# EAGLE board tinyha_blinds2_vrt (EAGLE 7.7.0)
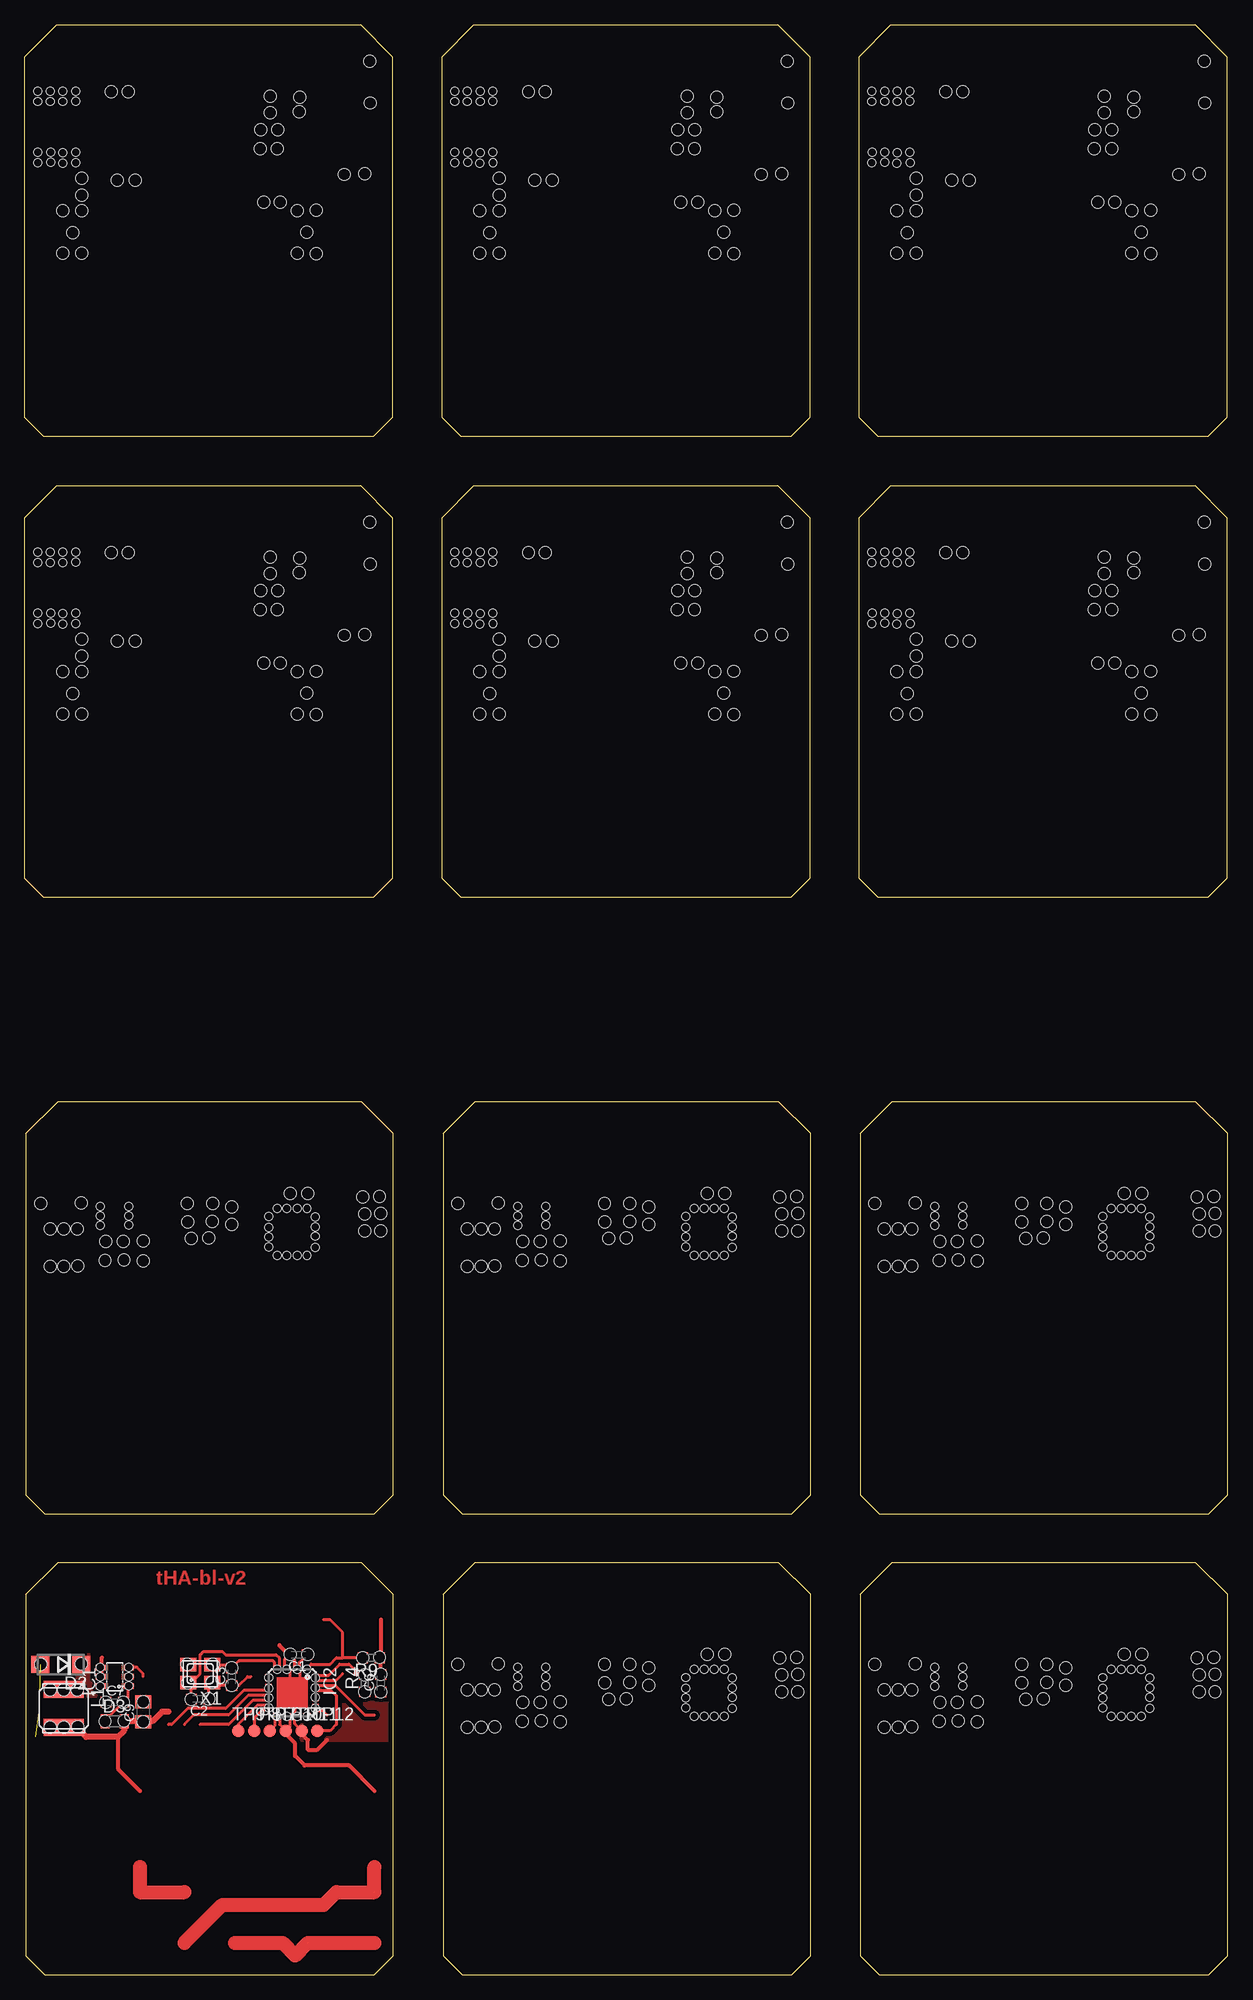
[diagram p0: board, top side]
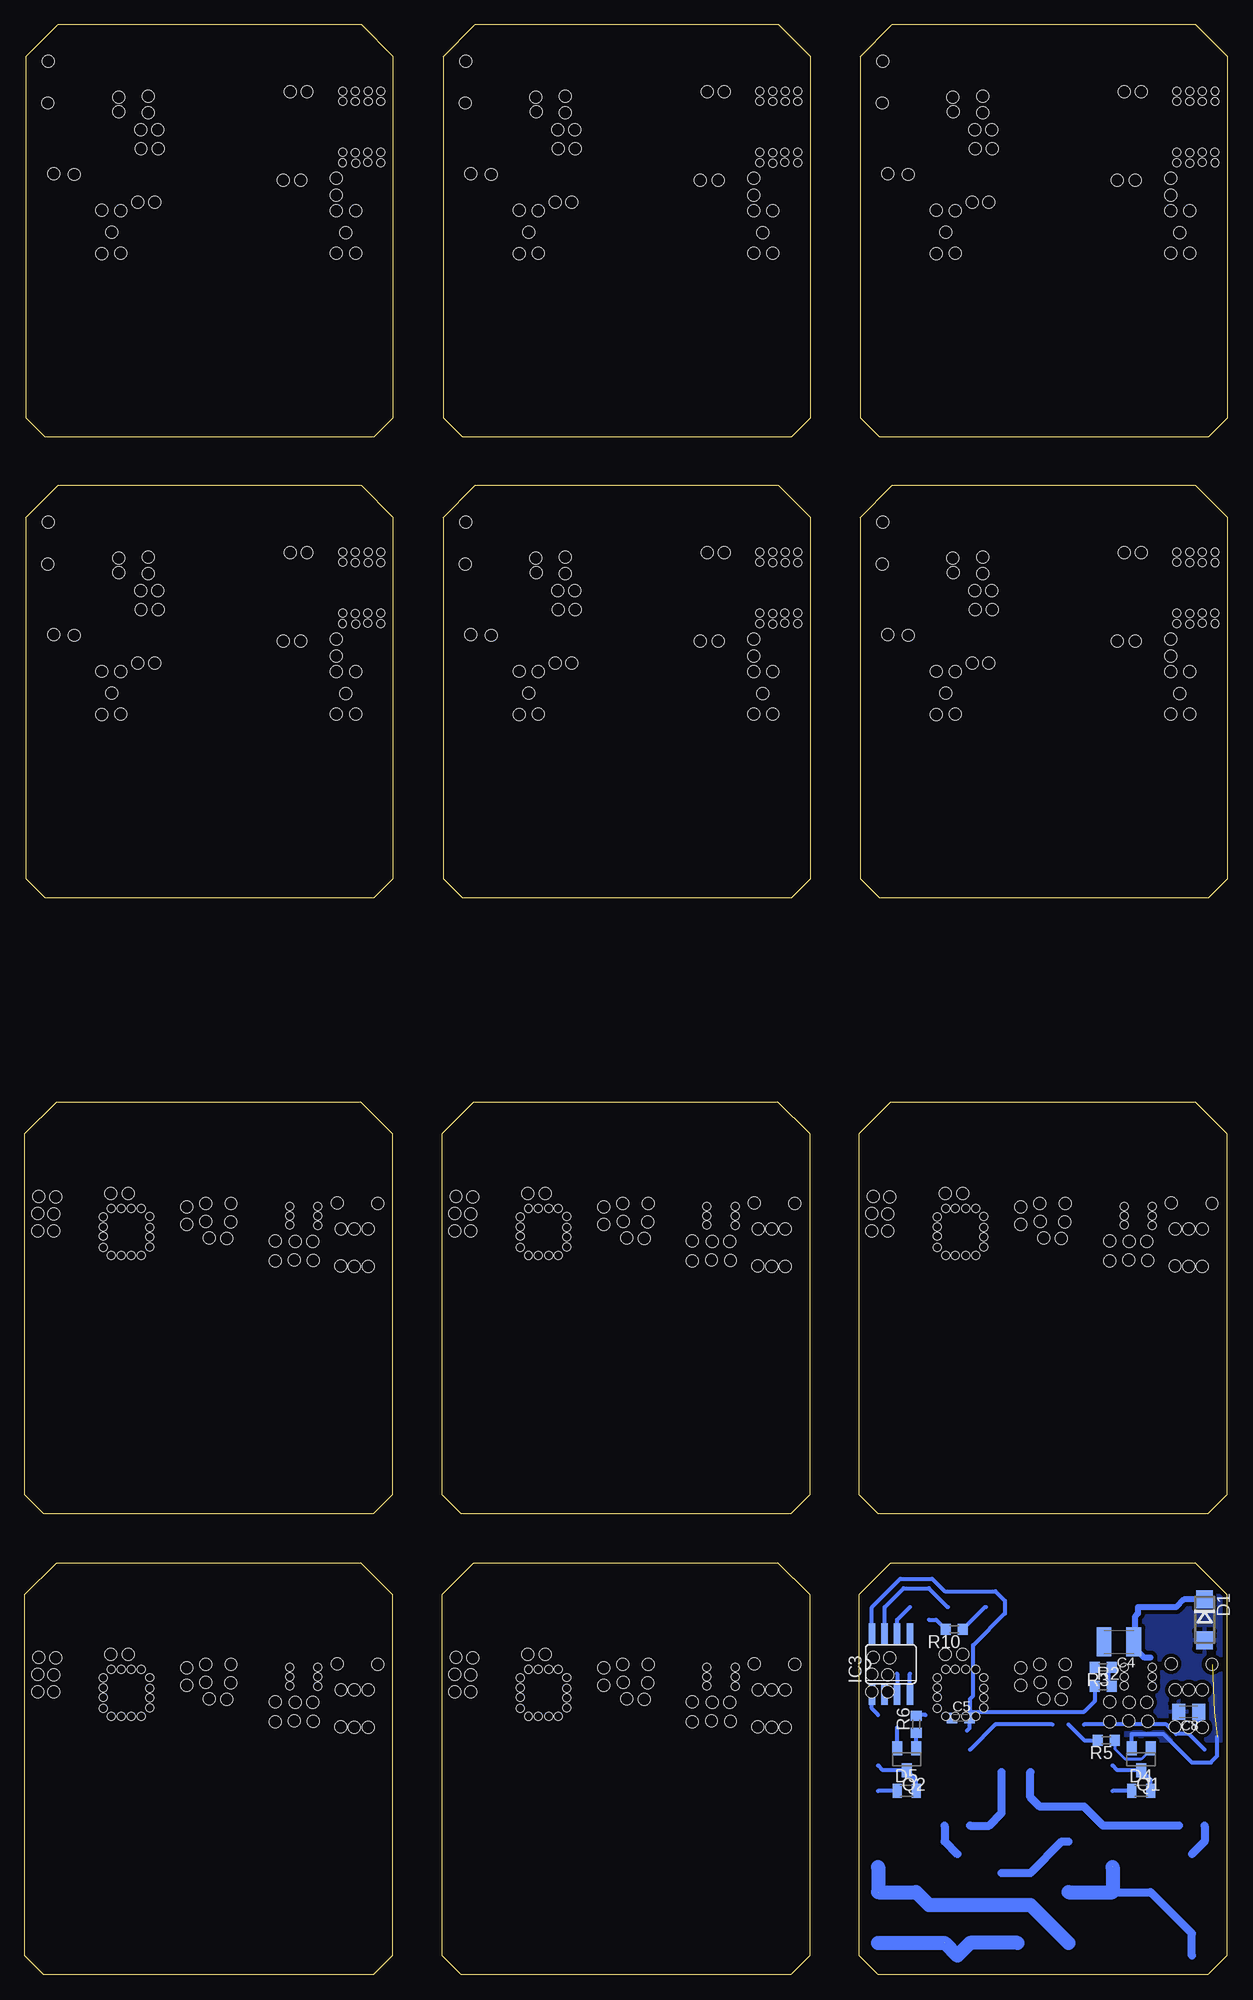
[diagram p1: board, bottom side, seen from below]

Size 120.53 x 195.43 mm. Coordinates in mm from the lower left corner, seen from the top.
Outline: 33.75,41.27 3.27,41.27 0.1,38.1 0.1,1.91 2,0 35.02,0 36.93,1.91 36.93,38.1 33.75,41.27
Outline: 75.55,41.27 45.07,41.27 41.9,38.1 41.9,1.91 43.8,0 76.82,0 78.73,1.91 78.73,38.1 75.55,41.27
Outline: 117.35,41.27 86.87,41.27 83.7,38.1 83.7,1.91 85.6,0 118.62,0 120.53,1.91 120.53,38.1 117.35,41.27
Outline: 33.75,87.47 3.27,87.47 0.1,84.3 0.1,48.1 2,46.2 35.02,46.2 36.93,48.1 36.93,84.3 33.75,87.47
Outline: 75.55,87.47 45.07,87.47 41.9,84.3 41.9,48.1 43.8,46.2 76.82,46.2 78.73,48.1 78.73,84.3 75.55,87.47
Outline: 117.35,87.47 86.87,87.47 83.7,84.3 83.7,48.1 85.6,46.2 118.62,46.2 120.53,48.1 120.53,84.3 117.35,87.47
Outline: 86.77,149.22 117.25,149.22 120.43,146.05 120.43,109.86 118.52,107.95 85.5,107.95 83.6,109.86 83.6,146.05 86.77,149.22
Outline: 44.97,149.22 75.46,149.22 78.63,146.05 78.63,109.86 76.72,107.95 43.71,107.95 41.8,109.86 41.8,146.05 44.97,149.22
Outline: 3.18,149.22 33.65,149.22 36.83,146.05 36.83,109.86 34.93,107.95 1.91,107.95 0,109.86 0,146.05 3.18,149.22
Outline: 86.77,195.43 117.25,195.43 120.43,192.25 120.43,156.06 118.52,154.15 85.5,154.15 83.6,156.06 83.6,192.25 86.77,195.43
Outline: 44.97,195.43 75.46,195.43 78.63,192.25 78.63,156.06 76.72,154.15 43.71,154.15 41.8,156.06 41.8,192.25 44.97,195.43
Outline: 3.18,195.43 33.65,195.43 36.83,192.25 36.83,156.06 34.93,154.15 1.91,154.15 0,156.06 0,192.25 3.18,195.43
Copper layers (1*16): Top 0.035mm / dielectric 1.5mm / Bottom 0.035mm
Design rules "temp *": minimum track width 10mil, minimum drill 0.5mm, track to track 0.19mm, track to pad 0.19mm, pad to pad 0.19mm, via to via 0.2mm, smd to smd 0mil, copper to edge 16mil, drill to drill 8mil, minimum pad ring 14mil, minimum via ring 10mil, stop-mask expansion 4mil, vias tented up to drill 0.6mm, thermal gap 16mil
Holes 1.2 mm at 8.1,27.3 9.85,27.3 8.02,25.4 9.93,25.43 11.83,25.32 11.83,27.33 1.57,31.11 5.63,31.17 16.28,31.09 18.82,31.09 18.79,29.31 16.3,29.26 16.68,27.61 18.44,27.64 20.72,28.98 20.72,30.73 26.56,32.08 28.32,32.08 33.85,31.75 35.53,31.78 35.66,30.1 34.06,30.05 34.06,28.35 35.66,28.35 3.91,28.52 5.25,28.52 2.54,28.52 3.91,24.79 5.28,24.84 2.54,24.79 49.9,27.3 51.65,27.3 49.82,25.4 51.73,25.43 53.63,25.32 53.63,27.33 43.37,31.11 47.43,31.17 58.08,31.09 60.62,31.09 60.59,29.31 58.1,29.26 58.48,27.61 60.24,27.64 62.52,28.98 62.52,30.73 68.36,32.08 70.12,32.08 75.65,31.75 77.33,31.78 77.46,30.1 75.86,30.05 75.86,28.35 77.46,28.35 45.71,28.52 47.05,28.52 44.34,28.52 45.71,24.79 47.08,24.84 44.34,24.79 91.7,27.3 93.45,27.3 91.62,25.4 93.53,25.43 95.43,25.32 95.43,27.33 85.17,31.11 89.23,31.17 99.88,31.09 102.42,31.09 102.39,29.31 99.9,29.26 100.28,27.61 102.04,27.64 104.32,28.98 104.32,30.73 110.16,32.08 111.92,32.08 117.45,31.75 119.13,31.78 119.26,30.1 117.66,30.05 117.66,28.35 119.26,28.35 87.51,28.52 88.85,28.52 86.14,28.52 87.51,24.79 88.88,24.84 86.14,24.79 8.1,73.5 9.85,73.5 8.02,71.6 9.93,71.63 11.83,71.52 11.83,73.53 1.57,77.31 5.63,77.37 16.28,77.29 18.82,77.29 18.79,75.51 16.3,75.46 16.68,73.81 18.44,73.84 20.72,75.18 20.72,76.93 26.56,78.28 28.32,78.28 33.85,77.95 35.53,77.98 35.66,76.3 34.06,76.25 34.06,74.55 35.66,74.55 3.91,74.72 5.25,74.72 2.54,74.72 3.91,70.99 5.28,71.04 2.54,70.99 49.9,73.5 51.65,73.5 49.82,71.6 51.73,71.63 53.63,71.52 53.63,73.53 43.37,77.31 47.43,77.37 58.08,77.29 60.62,77.29 60.59,75.51 58.1,75.46 58.48,73.81 60.24,73.84 62.52,75.18 62.52,76.93 68.36,78.28 70.12,78.28 75.65,77.95 77.33,77.98 77.46,76.3 75.86,76.25 75.86,74.55 77.46,74.55 45.71,74.72 47.05,74.72 44.34,74.72 45.71,70.99 47.08,71.04 44.34,70.99 91.7,73.5 93.45,73.5 91.62,71.6 93.53,71.63 95.43,71.52 95.43,73.53 85.17,77.31 89.23,77.37 99.88,77.29 102.42,77.29 102.39,75.51 99.9,75.46 100.28,73.81 102.04,73.84 104.32,75.18 104.32,76.93 110.16,78.28 111.92,78.28 117.45,77.95 119.13,77.98 119.26,76.3 117.66,76.25 117.66,74.55 119.26,74.55 87.51,74.72 88.85,74.72 86.14,74.72 87.51,70.99 88.88,71.04 86.14,70.99 118.17,145.57 118.22,141.4 111.13,141.99 111.11,140.51 108.16,140.44 108.16,142.09 108.92,138.73 107.22,138.73 107.17,136.83 108.9,136.8 115.6,134.24 117.66,134.32 112.81,130.63 110.91,130.61 109.2,131.44 107.53,131.47 111.84,128.47 112.81,126.31 110.91,126.36 93.96,142.54 92.26,142.54 94.65,133.68 92.87,133.68 89.31,133.88 89.31,132.18 89.31,130.61 87.38,130.61 88.4,128.42 89.31,126.36 87.38,126.36 76.37,145.57 76.42,141.4 69.33,141.99 69.31,140.51 66.36,140.44 66.36,142.09 67.12,138.73 65.42,138.73 65.37,136.83 67.1,136.8 73.8,134.24 75.86,134.32 71.01,130.63 69.1,130.61 67.4,131.44 65.73,131.47 70.04,128.47 71.01,126.31 69.1,126.36 52.16,142.54 50.46,142.54 52.85,133.68 51.07,133.68 47.51,133.88 47.51,132.18 47.51,130.61 45.58,130.61 46.6,128.42 47.51,126.36 45.58,126.36 34.57,145.57 34.62,141.4 27.53,141.99 27.51,140.51 24.56,140.44 24.56,142.09 25.32,138.73 23.62,138.73 23.57,136.83 25.3,136.8 32,134.24 34.06,134.32 29.21,130.63 27.3,130.61 25.6,131.44 23.93,131.47 28.24,128.47 29.21,126.31 27.3,126.36 10.36,142.54 8.66,142.54 11.05,133.68 9.27,133.68 5.71,133.88 5.71,132.18 5.71,130.61 3.78,130.61 4.8,128.42 5.71,126.36 3.78,126.36 118.17,191.77 118.22,187.6 111.13,188.19 111.11,186.71 108.16,186.64 108.16,188.29 108.92,184.93 107.22,184.93 107.17,183.03 108.9,183 115.6,180.44 117.66,180.52 112.81,176.83 110.91,176.81 109.2,177.65 107.53,177.67 111.84,174.67 112.81,172.51 110.91,172.56 93.96,188.74 92.26,188.74 94.65,179.88 92.87,179.88 89.31,180.08 89.31,178.38 89.31,176.81 87.38,176.81 88.4,174.62 89.31,172.56 87.38,172.56 76.37,191.77 76.42,187.6 69.33,188.19 69.31,186.71 66.36,186.64 66.36,188.29 67.12,184.93 65.42,184.93 65.37,183.03 67.1,183 73.8,180.44 75.86,180.52 71.01,176.83 69.1,176.81 67.4,177.65 65.73,177.67 70.04,174.67 71.01,172.51 69.1,172.56 52.16,188.74 50.46,188.74 52.85,179.88 51.07,179.88 47.51,180.08 47.51,178.38 47.51,176.81 45.58,176.81 46.6,174.62 47.51,172.56 45.58,172.56 34.57,191.77 34.62,187.6 27.53,188.19 27.51,186.71 24.56,186.64 24.56,188.29 25.32,184.93 23.62,184.93 23.57,183.03 25.3,183 32,180.44 34.06,180.52 29.21,176.83 27.3,176.81 25.6,177.65 23.93,177.67 28.24,174.67 29.21,172.51 27.3,172.56 10.36,188.74 8.66,188.74 11.05,179.88 9.27,179.88 5.71,180.08 5.71,178.38 5.71,176.81 3.78,176.81 4.8,174.62 5.71,172.56 3.78,172.56
Holes 0.8 mm at 7.57,30.78 7.57,29.82 7.57,28.88 10.38,30.78 10.38,29.84 10.38,28.93 25.27,30.58 26.26,30.58 27.28,30.58 28.27,30.58 29.1,29.74 29.1,28.73 29.1,27.81 29.1,26.7 24.43,29.77 24.43,28.7 24.43,27.74 24.43,26.75 25.27,25.88 26.26,25.88 27.28,25.88 28.27,25.88 49.37,30.78 49.37,29.82 49.37,28.88 52.18,30.78 52.18,29.84 52.18,28.93 67.07,30.58 68.06,30.58 69.08,30.58 70.07,30.58 70.9,29.74 70.9,28.73 70.9,27.81 70.9,26.7 66.23,29.77 66.23,28.7 66.23,27.74 66.23,26.75 67.07,25.88 68.06,25.88 69.08,25.88 70.07,25.88 91.17,30.78 91.17,29.82 91.17,28.88 93.98,30.78 93.98,29.84 93.98,28.93 108.87,30.58 109.86,30.58 110.88,30.58 111.87,30.58 112.7,29.74 112.7,28.73 112.7,27.81 112.7,26.7 108.03,29.77 108.03,28.7 108.03,27.74 108.03,26.75 108.87,25.88 109.86,25.88 110.88,25.88 111.87,25.88 7.57,76.98 7.57,76.02 7.57,75.08 10.38,76.98 10.38,76.05 10.38,75.13 25.27,76.78 26.26,76.78 27.28,76.78 28.27,76.78 29.1,75.94 29.1,74.93 29.1,74.01 29.1,72.9 24.43,75.97 24.43,74.9 24.43,73.94 24.43,72.95 25.27,72.08 26.26,72.08 27.28,72.08 28.27,72.08 49.37,76.98 49.37,76.02 49.37,75.08 52.18,76.98 52.18,76.05 52.18,75.13 67.07,76.78 68.06,76.78 69.08,76.78 70.07,76.78 70.9,75.94 70.9,74.93 70.9,74.01 70.9,72.9 66.23,75.97 66.23,74.9 66.23,73.94 66.23,72.95 67.07,72.08 68.06,72.08 69.08,72.08 70.07,72.08 91.17,76.98 91.17,76.02 91.17,75.08 93.98,76.98 93.98,76.05 93.98,75.13 108.87,76.78 109.86,76.78 110.88,76.78 111.87,76.78 112.7,75.94 112.7,74.93 112.7,74.01 112.7,72.9 108.03,75.97 108.03,74.9 108.03,73.94 108.03,72.95 108.87,72.08 109.86,72.08 110.88,72.08 111.87,72.08 88.68,142.6 88.68,141.58 87.41,141.55 87.41,142.6 86.14,142.6 86.14,141.55 84.87,141.55 84.87,142.6 88.68,136.45 88.71,135.43 87.38,135.36 87.41,136.42 86.17,136.45 86.17,135.46 84.9,136.47 84.87,135.41 46.88,142.6 46.88,141.58 45.61,141.55 45.61,142.6 44.34,142.6 44.34,141.55 43.07,141.55 43.07,142.6 46.88,136.45 46.91,135.43 45.58,135.36 45.61,136.42 44.37,136.45 44.37,135.46 43.1,136.47 43.07,135.41 5.08,142.6 5.08,141.58 3.81,141.55 3.81,142.6 2.54,142.6 2.54,141.55 1.27,141.55 1.27,142.6 5.08,136.45 5.11,135.43 3.78,135.36 3.81,136.42 2.57,136.45 2.57,135.46 1.3,136.47 1.27,135.41 88.68,188.8 88.68,187.78 87.41,187.75 87.41,188.8 86.14,188.8 86.14,187.75 84.87,187.75 84.87,188.8 88.68,182.65 88.71,181.63 87.38,181.56 87.41,182.62 86.17,182.65 86.17,181.66 84.9,182.67 84.87,181.61 46.88,188.8 46.88,187.78 45.61,187.75 45.61,188.8 44.34,188.8 44.34,187.75 43.07,187.75 43.07,188.8 46.88,182.65 46.91,181.63 45.58,181.56 45.61,182.62 44.37,182.65 44.37,181.66 43.1,182.67 43.07,181.61 5.08,188.8 5.08,187.78 3.81,187.75 3.81,188.8 2.54,188.8 2.54,187.75 1.27,187.75 1.27,188.8 5.08,182.65 5.11,181.63 3.78,181.56 3.81,182.62 2.57,182.65 2.57,181.66 1.3,182.67 1.27,181.61

## Footprints (pad centres in the part's own frame; a part is rotated, then mirrored left to right if it is on the bottom)
C0603K = smd 1.05 x 1.08: 1 -0.875,0; 2 0.875,0
C1210K = smd 1.5 x 2.9: 1 -1.5,0; 2 1.5,0
C0805K = smd 1.3 x 1.6: 1 -1,0; 2 1,0
DO214AC = smd 1.8 x 1.7: A 2.05,0; C -2.05,0
MICROMELF-W = smd 0.9 x 1.4: A 0.95,0; C -0.95,0
SOT23-6L = smd 0.55 x 1.2: 1 -0.95,-1.3; 2 0,-1.3; 3 0.95,-1.3; 4 0.95,1.3; 5 0,1.3; 6 -0.95,1.3
MLF32 = smd 0.7 x 0.3: 1 -2.35,1.75; 2 -2.35,1.25; 3 -2.35,0.75; 4 -2.35,0.25; 5 -2.35,-0.25; 6 -2.35,-0.75; 7 -2.35,-1.25; 8 -2.35,-1.75; 17 2.35,-1.75; 18 2.35,-1.25; 19 2.35,-0.75; 20 2.35,-0.25; 21 2.35,0.25; 22 2.35,0.75; 23 2.35,1.25; 24 2.35,1.75 | smd 0.3 x 0.7: 9 -1.75,-2.35; 10 -1.25,-2.35; 11 -0.75,-2.35; 12 -0.25,-2.35; 13 0.25,-2.35; 14 0.75,-2.35; 15 1.25,-2.35; 16 1.75,-2.35; 25 1.75,2.35; 26 1.25,2.35; 27 0.75,2.35; 28 0.25,2.35; 29 -0.25,2.35; 30 -0.75,2.35; 31 -1.25,2.35; 32 -1.75,2.35
SO08 = smd 0.66 x 2.032: 1 -1.905,-3.073; 2 -0.635,-3.073; 3 0.635,-3.073; 4 1.905,-3.073; 5 1.905,3.073; 6 0.635,3.073; 7 -0.635,3.073; 8 -1.905,3.073
DJNR5040 = smd 1.7 x 4: 1 -1.9,0; 2 1.9,0
SOT23-BEC = smd 1 x 1.4: B -0.95,-1.1; C 0,1.1; E 0.95,-1.1
R0603 = smd 1 x 1.1: 1 -0.85,0; 2 0.85,0
B1,27 = smd 1.27 x 1.27: TP 0,0
SMD3225 = smd 1.6 x 1.35: 1 1.2,0.9; 2 -1.2,0.9; 3 -1.2,-0.9; 4 1.2,-0.9

## Placement (x,y rotation side)
C1  100n  [C0603K]  27.4,32.07 180 top
C2  22p  [C0603K]  17.56,27.62 180 top
C3  22p  [C0603K]  20.73,29.84 90 top
C4  10u/50V  [C1210K]  10.89,33.34 180 bottom
C5  100n  [C0603K]  26.77,25.72 0 bottom
C6  100n  [C0603K]  35.66,29.21 90 top
C7  100n  [C0603K]  8.99,27.3 0 top
C8  10u  [C0805K]  3.91,26.35 180 bottom
C9  10u  [C0805K]  11.85,26.35 90 top
D1  P4SMAJ28A  [DO214AC]  2.32,35.56 270 bottom
D2  SS14  [DO214AC]  3.59,31.11 180 top
D3  1N4148  [MICROMELF-W]  8.99,25.4 0 top
D4  1N4148  [MICROMELF-W]  8.67,18.41 0 bottom
D5  1N4148  [MICROMELF-W]  32.16,18.41 0 bottom
IC1  MCP16301  [SOT23-6L]  8.99,29.84 90 top
IC2  ATMEGA88PA-AU  [MLF32]  26.77,28.26 270 top
IC3  ST485ECDR  [SO08]  33.75,31.11 0 bottom
L1  DJNR5040-150-S  [DJNR5040]  3.91,26.67 270 top
Q1  BC817-40SMD  [SOT23-BEC]  8.67,21.59 180 bottom
Q2  BC817-40SMD  [SOT23-BEC]  32.16,21.59 180 bottom
R2  27k  [R0603]  12.48,28.89 0 bottom
R3  5k1  [R0603]  12.48,30.8 180 bottom
R4  10k  [R0603]  34.07,29.21 90 top
R5  1k  [R0603]  12.16,23.5 180 bottom
R6  1k  [R0603]  31.21,25.08 90 bottom
R9  4k7  [R0603]  34.7,31.75 180 top
R10  220  [R0603]  27.4,34.61 180 bottom
TP7  TPB1,27  [B1,27]  24.55,24.45 0 top
TP8  TPB1,27  [B1,27]  22.96,24.45 0 top
TP9  TPB1,27  [B1,27]  21.37,24.45 0 top
TP10  TPB1,27  [B1,27]  26.13,24.45 0 top
TP11  TPB1,27  [B1,27]  27.72,24.45 0 top
TP12  TPB1,27  [B1,27]  29.31,24.45 0 top
X1  ILCX13-FF5F18-16.0000  [SMD3225]  17.56,30.16 180 top

## Library data of the parts
C1-C9 R2-R6 R9 R10 = rcl
D1-D5 = diode
IC1 L1 X1 = custom
IC2 = atmega8
IC3 = maxim; MF: MAXIM; MPN: MAX481CSA; OC_FARNELL: unknown; OC_NEWARK: 90C3817
Q1 Q2 = transistor-npn
TP7-TP12 = testpad

## Nets
+5V: C5.2 IC3.8 R2.1
DIR: IC3.2 IC3.3
GND: C1.1 C6.1 C8.2 C9.2 D1.A D2.A IC1.2 IC2.3 IC2.5 IC2.21 Q1.E R4.1 TP11.TP X1.4
N$4: Q2.B R6.1
N$5: Q1.B R5.1
N$6: IC2.13
N$7: IC2.25
N$8: IC2.29 TP12.TP
N$10: IC3.7
N$11: D5.A Q2.C
N$14: R2.2 R3.1
N$15: IC2.15 TP9.TP
N$18: R10.1
N$19: IC2.1 R9.2
N$20: C7.1 D2.C IC1.6 L1.1
N$21: D4.A Q1.C
N$22: C7.2 D3.C IC1.1
N$23: IC3.6
N$24: C3.2 IC2.8 X1.3
N$31: C2.2 IC2.7 X1.1
RXD: IC2.30
S$1: C5.1
S$2: Q2.E
S$3: C2.1 C3.1 X1.2
S$7: D5.C IC2.18 IC2.20 TP10.TP
S$8: C1.2 IC2.4 IC2.6
S$9: C8.1
S$10: C9.1 D3.A D4.C L1.2
S$11: C6.2 R9.1
S$12: IC3.1
S$13: IC2.32 R4.2
S$14: IC2.31
S$15: R5.2
S$16: R6.2
S$17: IC2.12
S$18: IC2.14
S$19: IC1.3
S$20: IC1.4 IC1.5
S$21: R10.2
TXD: IC3.4
UH: IC2.16 TP8.TP
VDD: C4.1 D1.C
WH: IC2.17 TP7.TP

## Tracks (layer width: path | path; a pad name or v marks a point on that pad's centre or on a via)
+5V
  Bottom 0.406: 26.13,24.45 25.89,24.69 C5.2 25.82,25.8 25.82,26.35 | 25.82,26.35 25.82,27.62 25.5,27.94 25.5,33.02 22.32,36.2 22.32,37.47 23.27,38.42 28.36,38.42 29.62,39.69 32.8,39.69 35.66,36.83 IC3.8 | R2.1 13.33,27.41 14.38,26.35 25.82,26.35
DIR
  Bottom 0.305: IC3.3 IC3.2
  Bottom 0.406: 33.12,30.16 IC3.3
GND  (2 unrouted)
  Top 0.305: C1.1 27.52,31.31 IC2.3 27.52,29.01 26.77,28.26 | IC2.5 26.52,28.51 26.77,28.26 | 26.77,28.26 27.02,28.01 IC2.21 27.02,25.15 TP11.TP
  Top 0.406: TP11.TP 27.72,24.13 28.36,23.5 28.36,22.54 29.31,22.54 30.26,23.5
  Bottom 0.406: 1.05,23.81 1.05,21.91 1.68,21.27 3.59,21.27 6.45,24.13 9.62,24.13 Q1.E
  pour Top (isolate 0.406, rank 2): 0.1,41.27 36.93,41.27 36.93,23.5 0.1,23.5
  pour Bottom (isolate 0.406): 0.1,41.27 36.93,41.27 36.93,23.5 0.1,23.5
N$1
  Bottom 0.813: 22.64,10.16 19.78,10.16 16.61,13.34 15.97,13.34
N$2  (1 unrouted)
  Top 1.422: 21.05,3.17 25.82,3.17 27.09,1.91 28.36,3.17 35.02,3.17
  Bottom 1.422: 21.05,3.17 25.82,3.17 27.09,1.91 28.36,3.17 35.02,3.17
N$3  (1 unrouted)
  Top 1.422: 11.53,10.79 11.53,8.26 15.97,8.26
  Bottom 0.813: 11.53,8.26 7.72,8.26 3.59,4.13 3.59,1.91
  Bottom 1.422: 11.53,10.79 11.53,8.26 15.97,8.26
N$4
  Bottom 0.406: Q2.B R6.1
N$5
  Bottom 0.305: Q1.B 7.72,22.54 8.67,21.59 10.26,21.59 11.31,22.64 R5.1
N$6
  Top 0.305: IC2.13 22.39,28.01 20.42,26.04 16.93,26.04 15.97,25.08
N$7
  Top 0.305: IC2.25 29.79,26.51 30.26,26.04
N$8
  Top 0.305: 29.69,28.51 IC2.29 30.64,28.51 31.21,27.94 31.21,25.08 30.58,24.45 TP12.TP
N$9
  Bottom 0.406: 14.38,25.08 6.13,25.08 5.18,24.13 3.91,24.13 2.32,22.54
N$10
  Bottom 0.406: IC3.7 34.39,36.83 32.48,38.73 29.94,38.73 28.04,36.83
N$11
  Bottom 0.406: D5.A 31.21,19.54 Q2.C 34.56,20.49 35.02,20.95
N$12
  Bottom 0.406: 17.56,25.08 23.27,25.08 25.82,22.54
N$13
  Bottom 0.813: 22.64,20.32 22.64,16.19 23.91,14.92 25.82,14.92
N$14
  Bottom 0.305: R2.2 11.85,29.11 11.85,30.58 R3.1
N$15
  Top 0.305: IC2.15 23.3,27.01 21.37,25.08 TP9.TP
N$16  (1 unrouted)
  Top 1.422: 15.97,3.17 19.78,6.99 29.94,6.99 31.21,8.26 35.02,8.26 35.02,10.79
  Bottom 1.422: 35.02,10.79 35.02,8.26 31.21,8.26 29.94,6.99 19.78,6.99 15.97,3.17
N$17
  Bottom 0.813: 28.36,14.92 28.36,13.34 27.09,12.06
N$18
  Bottom 0.406: 24.23,36.83 24.33,36.83 R10.1
N$19
  Top 0.305: IC2.1 28.52,30.96 28.67,31.11 30.58,31.11 31.21,31.75 31.85,31.75 | R9.2 31.85,31.75 | 31.85,31.75 31.85,34.29 30.58,35.56 29.94,35.56
N$20
  pour Top (isolate 0.406, no thermals): 5.18,32.07 5.18,27.94 7.08,27.94 7.72,27.3 8.04,27.3 8.04,29.21 6.45,29.21 6.45,32.07
N$21
  Bottom 0.406: 11.53,20.95 11.06,20.49 Q1.C 7.72,19.54 D4.A
N$22
  Top 0.305: IC1.1 10.29,27.73 C7.2 8.04,25.48 D3.C
N$23
  Bottom 0.406: IC3.6 33.12,35.56 31.85,36.83
N$24
  Top 0.305: IC2.8 25.02,31.28 24.86,31.43 21.45,31.43 C3.2 20.39,31.06 X1.3
N$31
  Top 0.305: IC2.7 25.52,31.73 25.18,32.07 20.1,32.07 19.78,32.38 17.88,32.38 17.56,32.07 17.56,30.16 16.66,29.26 X1.1 16.68,28.94 C2.2
N$55
  Bottom 0.813: 2.32,14.92 2.32,13.34 3.59,12.06
N$56
  Bottom 0.813: 4.86,14.92 12.48,14.92 14.38,16.83 18.83,16.83 19.78,17.78 19.78,20.32
RXD
  Top 0.305: 35.02,26.04 34.07,26.04 31.1,29.01 IC2.30
S$2
  Bottom 0.406: 33.12,24.77 33.11,24.76 Q2.E
S$3
  Top 0.305: 22.64,29.84 22.32,29.84 21.45,28.97 C3.1 19.05,28.97 X1.2 18.43,28.94 C2.1
S$7  (1 unrouted)
  Top 0.305: IC2.20 26.52,24.83 TP10.TP 25.52,25.06 IC2.18
  Top 0.406: 35.02,18.41 32.48,20.95 28.04,20.95 27.09,21.91 27.09,23.18 26.13,24.13 TP10.TP
  Bottom 0.406: D5.C 35.02,18.41
S$8
  Top 0.305: IC2.6 26.02,31.56 C1.2 27.02,31.58 IC2.4
  Top 0.406: C1.2 26.45,32.07 25.5,33.02
S$9
  Bottom 0.61: C8.1 2.91,25.04 2.64,24.77
S$10  (1 unrouted)
  Top 0.406: C9.1 11.57,25.35 11.53,25.4 | 11.53,18.41 9.3,20.64 9.3,23.81 | 4.29,24.39 L1.2
  Top 0.61: 14.38,26.35 13.75,26.35 12.8,25.4 11.89,25.4 C9.1 | 11.53,25.4 D3.A 9.94,24.45 9.3,23.81 6.13,23.81 5.18,24.77 L1.2 | 2.64,24.77 L1.2
  Top 0.813: L1.2
  Bottom 0.406: D4.C 11.53,18.41
S$11
  Top 0.406: C6.2 35.66,31.65 R9.1 35.66,31.85 35.66,35.56
S$12
  Bottom 0.406: IC3.1 35.66,26.67 35.02,26.04
S$13
  Top 0.305: 33.12,30.16 33.12,30.48 32.48,31.11 31.53,31.11 30.42,30.01 IC2.32
  Top 0.406: R4.2 33.97,30.16 33.12,30.16
S$14
  Top 0.305: 31.85,30.16 31.19,29.51 IC2.31
S$15
  Bottom 0.406: 15.97,25.08 14.38,23.5 R5.2
S$16
  Bottom 0.406: R6.2 31.11,26.04 30.26,26.04
S$17
  Top 0.305: IC2.12 21.94,28.51 20.1,26.67 16.29,26.67 14.7,25.08 14.38,25.08
S$18
  Top 0.305: IC2.14 22.84,27.51 20.42,25.08 17.56,25.08
S$19
  Top 0.305: IC1.3 11.21,30.8 11.85,30.16 11.85,29.84
S$20
  Top 0.406: 7.72,31.75 7.69,31.72 IC1.4 IC1.5
S$21
  Bottom 0.406: 29.94,35.56 29.21,35.56 R10.2
TXD
  Bottom 0.406: IC3.4 31.85,30.16
UH
  Top 0.305: IC2.16 23.75,26.51 22.96,25.72 TP8.TP
VDD
  Bottom 0.61: 9.3,33.42 9.3,35.88 8.99,36.2 8.99,36.83 5.18,36.83 4.4,37.61 D1.C | 7.72,31.75 8.35,31.75 9.62,33.02 9.62,33.11 C4.1
  Bottom 0.813: 9.3,33.42 C4.1 9.3,33.25
WH
  Top 0.305: IC2.17 25.02,24.92 TP7.TP

## Text on the board
Top: tHA-bl-v2